# Altium PCB MT-PowerDivider V1.0.0.PcbDoc
Units mm, origin at the board's own origin, x right, y up, seen from the top; angles counter-clockwise.
Board outline 75.06 x 73.51 mm, 2 copper layers (Top Layer, Bottom Layer); 124 components, 81 nets, 532 pads, 31 vias.
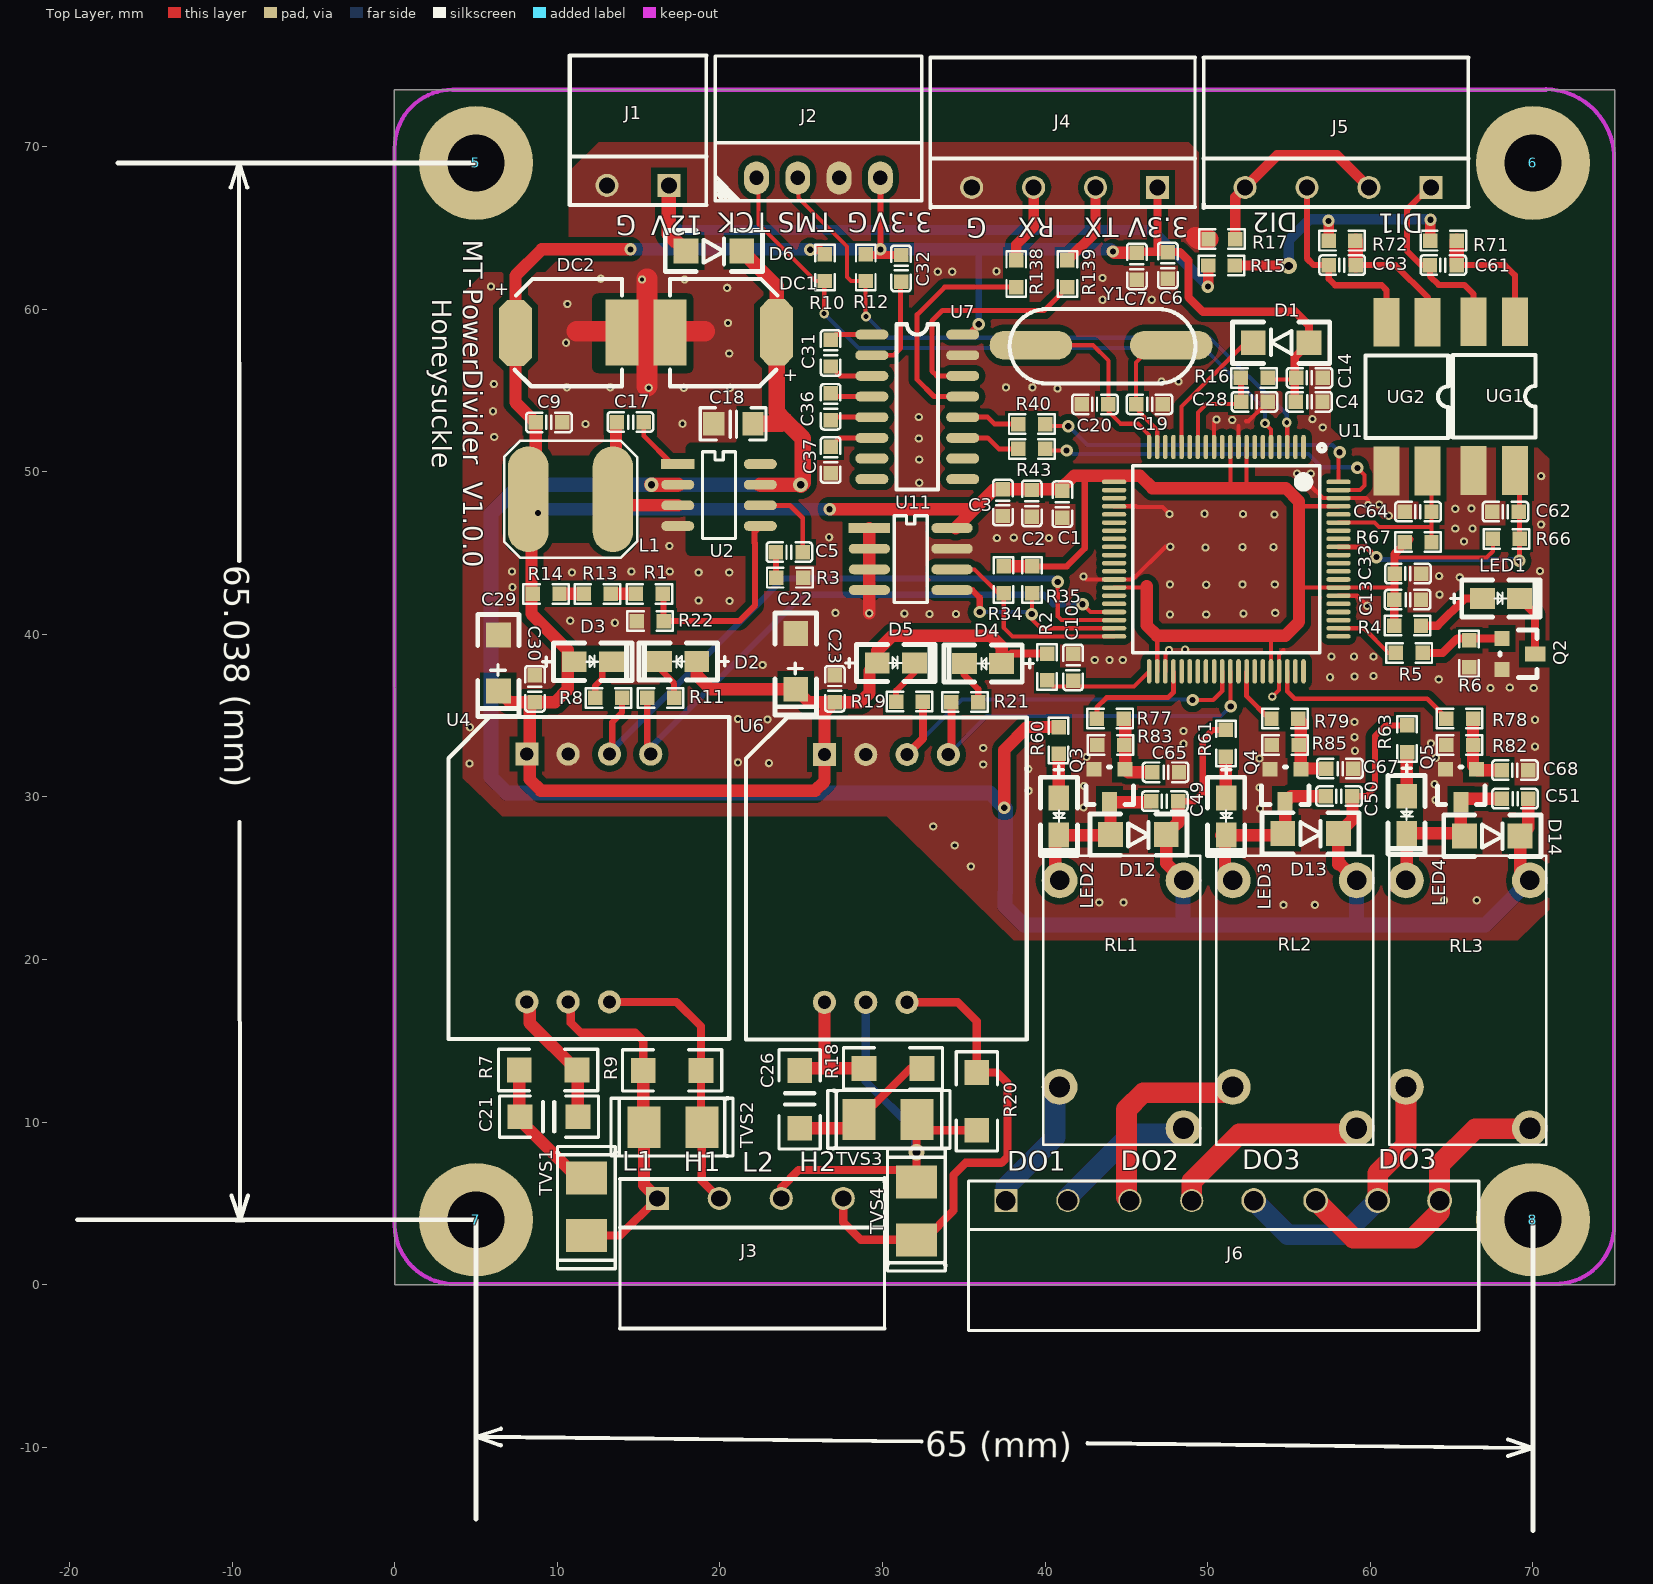
[diagram p0: Top Layer view]
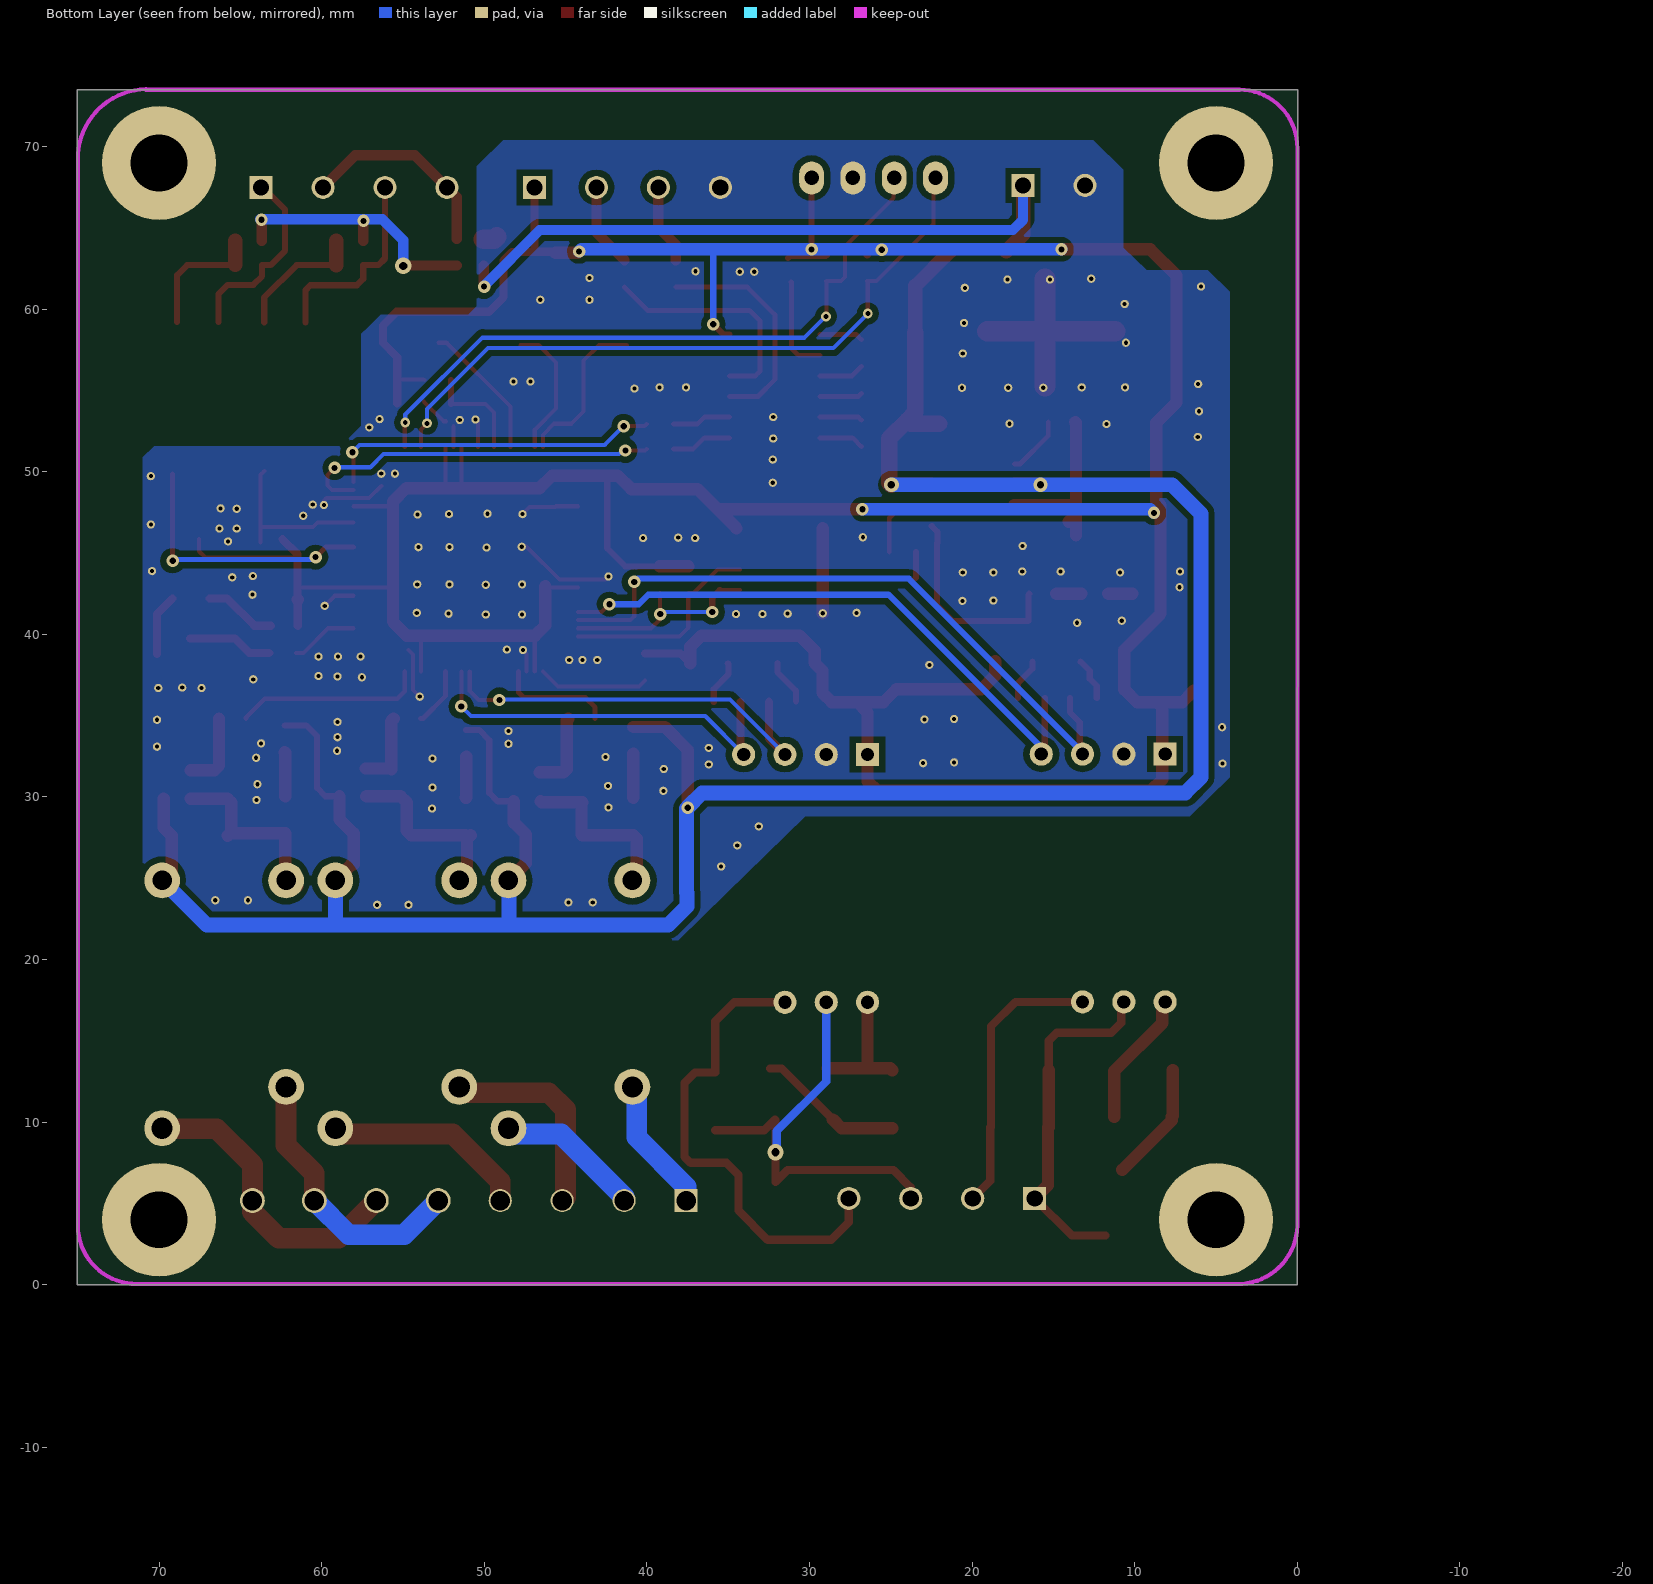
[diagram p1: Bottom Layer view, seen from below]

## Layer stack, top to bottom
Top Layer: signal copper 0.0356
Dielectric: dielectric 0.32, FR-4, Dk 4.8
Bottom Layer: signal copper 0.0356

## Board outline
0,0 6.934,0 74.981,0 75.032,0 75.032,5.436 75.032,73.381 75.032,73.482 69.893,73.482 69.875,73.5 50.622,73.5 -0.018,73.5 -0.025,73.508

## Design rules (kind name [scope] priority, off if disabled: settings)
Clearance Clearance_1 [INPolygon] p1: gap=0.381
Clearance [All] p2: gap=0.152
ComponentClearance [All] p1 off: gap=0 collisioncheckmode=3 verticalgap=0 showdistances=FALSE
HoleSize [All] p1: absolutevalues=TRUE maxlimit=12.7 minlimit=0.025 maxpercent=80.000 minpercent=20.000
HoleToHoleClearance [All] p1 off: gap=0.254 allowstackedmicrovias=TRUE
MinimumSolderMaskSliver [All] p1: minsoldermaskwidth=0
NetAntennae [All] p1: netantennaetolerance=0.254
PlaneConnect PlaneConnect_1 [All] p1: planeconnectstyle=NoConnect reliefexpansion=0.508 reliefentries=4 reliefconductorwidth=0.254 reliefairgap=0.254
PolygonConnect PolygonConnect_1 [IsVia] p1: connectstyle=Direct reliefconductorwidth=0.254 reliefentries=4 polygonreliefangle="90 Angle" airgapwidth=0.254
PolygonConnect [All] p2: connectstyle=Direct reliefconductorwidth=0.254 reliefentries=4 polygonreliefangle="90 Angle" airgapwidth=0.254
RoutingVias [All] p1: holewidth=0.305 width=0.61 viastyle="Through Hole" minholewidth=0.254 minwidth=0.457 maxholewidth=10 maxwidth=10
SilkToSilkClearance [All] p1: silktosilkclearance=0
SilkToSolderMaskClearance [IsPad] p1: minsilkscreentomaskgap=0 clearancetoexposedcopper=TRUE
SolderMaskExpansion [All] p1: expansion=0.102
Width Width_1 [All] p1: maxlimit=1.27 minlimit=0.127 preferedwidth=0.254
20 further rules are at their usual default settings.

## Components (designator, comment, footprint, x,y, rotation, side; value= is the part's Value field where it differs from the comment)
5 "" HOLD-3.5MM#1 -12.573,68.809 r90 top
6 "" HOLD-3.5MM#2 81.458,69.037 r90 top
7 "" HOLD-3.5MM#3 81.93,5.182 r90 top
8 "" HOLD-3.5MM#4 92.445,5.182 r90 top
C1 "0.1uF" 0603C 41.061,48.006 r270 top
C2 "0.1uF" 0603C 39.181,48.057 r270 top
C3 "0.1uF" 0603C 37.403,48.108 r270 top
C4 "0.1uF" 0603C 56.236,54.305 r0 top
C5 "3.9nF" 0603C 24.272,45.06 r180 top
C6 "0.1uF" 0603C 47.549,62.687 r270 top
C7 "0.1uF" 0603C 45.644,62.636 r270 top
C9 "104" 0603C 9.489,53.035 r180 top
C10 "0.1uF/NC" 0603C 41.721,37.973 r270 top
C13 "10nF" 0603C 62.295,42.139 r0 top
C14 "0.1uF" 0603C 56.261,55.778 r180 top
C17 "103" 0603C 14.493,53.061 r0 top
C18 "0.1uF" 0805C 19.75,52.959 r0 top
C19 "22P" 0603C 46.42,54.153 r0 top
C20 "22P" 0603C 43.068,54.153 r180 top
C21 "10nF/2KV/1206" 1206C 9.489,10.338 r0 top
C22 "10uF/16V" CA1206 24.678,36.627 r270 top
C23 "0.1uF" 0603C 27.066,36.652 r90 top
C26 "10nF/2KV/1206" 1206C 24.907,11.405 r270 top
C28 "0.1uF" 0603C 52.883,54.305 r180 top
C29 "10uF/16V" CA1206 6.39,36.525 r270 top
C30 "0.1uF" 0603C 8.625,36.652 r270 top
C31 "0.1uF" 0603C 26.812,57.302 r90 top
C32 "0.1uF" 0603C 31.14,62.509 r90 top
C33 "1uF" 0603C 62.321,43.739 r180 top
C36 "0.1uF" 0603C 26.812,54 r90 top
C37 "0.1uF" 0603C 26.812,50.724 r90 top
C49 "104" 0603C 47.36,29.743 r180 top
C50 "104" 0603C 58.079,30.048 r180 top
C51 "104" 0603C 68.899,29.896 r0 top
C61 "104" 0603C 64.491,62.713 r180 top
C62 "104" 0603C 68.315,47.549 r180 top
C63 "104" 0603C 58.268,62.713 r180 top
C64 "104" 0603C 62.941,47.549 r180 top
C65 "103" 0603C 47.411,31.521 r0 top
C67 "104" 0603C 58.13,31.75 r0 top
C68 "104" 0603C 68.899,31.648 r180 top
D1 "1N4148" 1206D 54.523,57.937 r180 top
D2 "GREEN" D0805 18.582,38.329 r270 top
D3 "RED" D0805 11.038,38.329 r90 top
D4 "GREEN" D0805 37.327,38.202 r270 top
D5 "RED" D0805 29.682,38.252 r90 top
D6 "1N4007" 1206D 19.623,63.576 r0 top
D12 "1N4007" 1206D 45.735,27.686 r0 top
D13 "1N4007" 1206D 56.326,27.762 r0 top
D14 "1N4007" 1206D 67.502,27.61 r0 top
DC1 "100uF/25V" C100UF16VEJ 23.484,58.572 r180 top
DC2 "100uF/25V" C100UF16VEJ 7.431,58.554 r0 top
J1 "CON2" KF2EDG-2P=3.81mm 16.866,67.615 r180 top
J2 "CON4" COM4-2.54mm-90 22.25,68.072 r0 top
J3 "HEADER 4" KF2EDG-4P-3.81mm 16.154,5.309 r0 top
J4 "HEADER 4" KF2EDG-4P-3.81mm 46.914,67.488 r180 top
J5 "HEADER 4" KF2EDG-4P-3.81mm 63.729,67.488 r180 top
J6 "CON8" KF2EDG-8P-3.81mm 37.592,5.182 r0 top
L1 "22uH" LC7*7*3_L 10.82,48.311 r180 top
LED1 "RED" D0805 66.893,42.215 r90 top
LED2 "RED" D0805 40.858,29.947 r0 top
LED3 "RED" D0805 51.145,29.947 r0 top
LED4 "RED" D0805 62.245,30.048 r0 top
Q2 "8050" SOT23 68.087,39.751 r270 top
Q3 "8050" SOT23 44.922,31.725 r180 top
Q4 "8050" SOT23 55.729,31.725 r180 top
Q5 "8050" SOT23 66.537,31.725 r180 top
R1 "1.1kΩ%" 0603R 15.661,42.494 r0 top
R2 "10K" 0603R 40.121,37.998 r90 top
R3 "6.8k" 0603R 24.297,43.485 r0 top
R4 "10K" 0603R 62.295,40.538 r180 top
R5 "10K" 0603R 62.397,38.862 r0 top
R6 "3K" 0603R 66.08,38.811 r90 top
R7 "1M" 1206R 9.438,13.208 r0 top
R8 "1.5k" 0603R 13.159,36.093 r0 top
R9 "120R" 1206R 17.058,13.183 r0 top
R10 "10K" 0603R 26.456,62.56 r90 top
R11 "1.5k" 0603R 16.359,36.093 r180 top
R12 "10K" 0603R 28.971,62.56 r90 top
R13 "10k%1" 0603R 12.461,42.494 r0 top
R14 "15k%1" 0603R 9.311,42.494 r0 top
R15 "0R" 0603R 50.851,62.687 r180 top
R16 "10K" 0603R 52.857,55.778 r180 top
R17 "0R" 0603R 50.876,64.313 r180 top
R18 "1M" 1206R 30.647,13.31 r0 top
R19 "1.5k" 0603R 31.663,35.865 r0 top
R20 "120R" 1206R 35.803,11.278 r90 top
R21 "1.5k" 0603R 35.067,35.839 r180 top
R22 "10k%1" 0603R 15.712,40.818 r180 top
R34 "10k" 0603R 37.454,43.358 r270 top
R35 "10K" 0603R 39.207,43.358 r270 top
R40 "0R" 0603R 39.181,52.934 r180 top
R43 "0R" 0603R 39.181,51.41 r180 top
R60 "10K" 0603R 40.832,33.477 r90 top
R61 "10K" 0603R 51.119,33.299 r90 top
R63 "10K" 0603R 62.27,33.579 r90 top
R66 "10K" 0603R 68.366,45.872 r0 top
R67 "10K" 0603R 62.941,45.669 r0 top
R71 "10K" 0603R 64.505,64.211 r0 top
R72 "10K" 0603R 58.262,64.211 r0 top
R77 "5.1K" 0603R 44.007,34.823 r0 top
R78 "5.1K" 0603R 65.496,34.823 r0 top
R79 "5.1K" 0603R 54.752,34.823 r0 top
R82 "4.7K" 0603R 65.496,33.198 r0 top
R83 "4.7K" 0603R 44.033,33.198 r0 top
R85 "4.7K" 0603R 54.764,33.198 r0 top
R138 "10R" 0603R 38.227,62.179 r90 top
R139 "10R" 0603R 41.377,62.179 r90 top
RL1 "JQ1P-24V" HF32F-12V 41.91,24.867 r90 top
RL2 "JQ1P-24V" HF32F-12V 52.56,24.867 r90 top
RL3 "JQ1P-24V" HF32F-12V 63.21,24.867 r90 top
TVS1 "BA301N" 3528TVS 11.786,6.579 r90 top
TVS2 "BA301N" 3528TVS 18.887,9.703 r0 top
TVS3 "BA301N" 3528TVS 28.564,10.16 r180 top
TVS4 "BA301N" 3528TVS 32.095,2.769 r270 top
U1 "LPC1756FBD80" LQFP-80 51.145,44.628 r180 top
U2 "EUP3484" SOP8#1 17.414,50.47 r0 top
U4 "CTM8251" CTM8251KT 8.128,32.639 r270 top
U6 "CTM8251" CTM8251KT 26.431,32.614 r270 top
U7 "SP3232" SO-16 29.352,58.445 r0 top
U11 "AT24C16" SOP8#2 29.199,46.533 r0 top
UG1 "PS2501L-1" DIP-4 68.899,59.207 r0 top
UG2 "PS2501L-1" DIP-4 63.54,59.182 r0 top
Y1 "12M" ZS_SMD 39.131,57.785 r0 top locked

## Footprints (in the part's own frame and the unit in brackets; to place one, negate y for a bottom-side part, rotate by r counter-clockwise, add the part's x,y. Pads: shape width x height; smd on the part's side, far side on the other; paste and mask are expansions set on the pad)
0603C [mil]
  rect 35x35 smd: 1(-32.5,0) 2(32.5,0)
  silkscreen extent -55,-24 55,24
0603R [mil]
  rect 35x35 smd: 1(-32.5,0) 2(32.5,0)
  silkscreen extent -55,-24 55,24
0805C [mil]
  rect 52x56 smd: 1(-5,0) 2(90,0)
  silkscreen extent -38,-40 121,38
1206C [mil]
  rect 60x60 smd: 1(-70,0) 2(70,0)
  silkscreen extent -120,-50 120,50
1206D [mil]
  rect 60x60 smd: 1(-67.5,0) 2(67.5,0)
  silkscreen extent -118,-50 117,50
1206R [mil]
  rect 60x60 smd: 1(-70,0) 2(70,0)
  silkscreen extent -120,-50 120,50
3528TVS [mil]
  rect 80x100 smd: 1(0.09,-0.25) 2(-139.91,-0.25)
  silkscreen extent -220,-70 76,70
C100UF16VEJ [mil]
  oct 80x160 smd: 1(-0.01,-0.43)
  rect 80x160 smd: 2(257.94,0.35)
  silkscreen extent -2,-130 258,130
CA1206 [mil]
  rect 60x60 smd: 1(-0.08,-0.48) 2(-135.08,-0.48)
  silkscreen extent -185,-50 62,50
COM4-2.54mm-90 [mil]
  oval 60x80 hole 35: 1(0,0) 2(100,0) 3(200,0) 4(300,0)
  silkscreen extent -100,-55 400,295
CTM8251KT [mil]
  rect 56x56 hole 32: 1(0,0)
  round 56 hole 32: 2(0,100) 3(0,200) 4(0,300) 6(600,200) 7(600,100) 8(600,0)
  silkscreen extent -90,-190 690,490, body extent -90,-190 690,490, height 276
D0805 [mil]
  rect 50x60 smd: 1(-0.34,-0.09) 2(-0.34,-90.09)
  silkscreen extent -45,-140 45,77
DIP-4 [mm]
  rect 1.6x3 smd: 1(-0.008,0.015) 2(-2.548,0.015) 3(-2.548,-9.129) 4(-0.008,-9.129)
  silkscreen extent -3.82,-7.1 1.26,-2.02
HF32F-12V [mm]
  round 2.2 hole 1.2: 1(0,1.016) 2(0,-6.604)
  round 2.2 hole 1.3: 3(-12.7,1.016) 4(-15.24,-6.604)
  silkscreen extent -16.26,-7.62 1.52,2.03
HOLD-3.5MM#1 [mm] "HOLD-3.5MM"
  round 7 hole 3.5: 1(0.191,-17.573)
HOLD-3.5MM#2 [mm] "HOLD-3.5MM"
  round 7 hole 3.5: 1(-0.037,11.458)
HOLD-3.5MM#3 [mm] "HOLD-3.5MM"
  round 7 hole 3.5: 1(-1.182,76.93)
HOLD-3.5MM#4 [mm] "HOLD-3.5MM"
  round 7 hole 3.5: 1(-1.182,22.445)
KF2EDG-2P=3.81mm [mil]
  rect 56x56 hole 39.37: 1(0,0)
  round 56 hole 39.37: 2(150,0)
  silkscreen extent -91,-315 240,47
KF2EDG-4P-3.81mm [mil]
  rect 56x56 hole 39.37: 1(0,0)
  round 56 hole 39.37: 2(150,0) 3(300,0) 4(450,0)
  silkscreen extent -91,-315 550,50
KF2EDG-8P-3.81mm [mil]
  rect 56x56 hole 47.24: 1(0,0)
  round 56 hole 47.24: 2(150,0) 3(300,0) 4(450,0)
  round 60 hole 47.24: 5(600,0) 6(750,0) 7(900,0) 8(1050,0)
  silkscreen extent -91,-315 1145,47
LC7*7*3_L [mm]
  oval 2.5x6.5 smd: 1(-2.6,0) 2(2.6,0)
  Top Layer pour cut-out: -1.803,2.705 1.854,2.705 1.854,-2.705 -1.803,-2.705
  silkscreen extent -4.09,-3.61 4.09,3.61, body extent -2.46,-2.4 1.85,2.4, height 3.5
LQFP-80 [mm] "LQFP-80_12x12x05P"
  oval 0.28x1.5 smd mask+0.051: 1(-4.75,-6.9) 2(-4.25,-6.9) 3(-3.75,-6.9) 4(-3.25,-6.9) 5(-2.75,-6.9) 6(-2.25,-6.9) 7(-1.75,-6.9) 8(-1.25,-6.9) 9(-0.75,-6.9) 10(-0.25,-6.9) 11(0.25,-6.9) 12(0.75,-6.9) 13(1.25,-6.9) 14(1.75,-6.9) 15(2.25,-6.9) 16(2.75,-6.9) 17(3.25,-6.9) 18(3.75,-6.9) 19(4.25,-6.9) 20(4.75,-6.9) 41(4.75,6.9) 42(4.25,6.9) 43(3.75,6.9) 44(3.25,6.9) 45(2.75,6.9) 46(2.25,6.9) 47(1.75,6.9) 48(1.25,6.9) 49(0.75,6.9) 50(0.25,6.9) 51(-0.25,6.9) 52(-0.75,6.9) 53(-1.25,6.9) 54(-1.75,6.9) 55(-2.25,6.9) 56(-2.75,6.9) 57(-3.25,6.9) 58(-3.75,6.9) 59(-4.25,6.9) 60(-4.75,6.9)
  oval 1.5x0.28 smd mask+0.051: 21(6.9,-4.75) 22(6.9,-4.25) 23(6.9,-3.75) 24(6.9,-3.25) 25(6.9,-2.75) 26(6.9,-2.25) 27(6.9,-1.75) 28(6.9,-1.25) 29(6.9,-0.75) 30(6.9,-0.25) 31(6.9,0.25) 32(6.9,0.75) 33(6.9,1.25) 34(6.9,1.75) 35(6.9,2.25) 36(6.9,2.75) 37(6.9,3.25) 38(6.9,3.75) 39(6.9,4.25) 40(6.9,4.75) 61(-6.9,4.75) 62(-6.9,4.25) 63(-6.9,3.75) 64(-6.9,3.25) 65(-6.9,2.75) 66(-6.9,2.25) 67(-6.9,1.75) 68(-6.9,1.25) 69(-6.9,0.75) 70(-6.9,0.25) 71(-6.9,-0.25) 72(-6.9,-0.75) 73(-6.9,-1.25) 74(-6.9,-1.75) 75(-6.9,-2.25) 76(-6.9,-2.75) 77(-6.9,-3.25) 78(-6.9,-3.75) 79(-6.9,-4.25) 80(-6.9,-4.75)
  silkscreen extent -6.07,-7.05 5.75,5.75
SO-16 [mil]
  oval 80x24 smd: 1(-0.2,-0.3) 2(-0.2,-50.3) 3(-0.2,-100.3) 4(-0.2,-150.3) 5(-0.2,-200.3) 6(-0.2,-250.3) 7(-0.2,-300.3) 8(-0.2,-350.3) 9(219.8,-350.3) 10(219.8,-300.3) 11(219.8,-250.3) 12(219.8,-200.3) 13(219.8,-150.3) 14(219.8,-100.3) 15(219.8,-50.3) 16(219.8,-0.3)
  silkscreen extent 60,-375 160,25
SOP8#1 [mm]
  rect 2.032x0.6 smd: 1(-0.006,0.006)
  oval 2.032x0.6 smd: 2(-0.006,-1.264) 3(-0.006,-2.534) 4(-0.006,-3.804) 5(5.074,-3.804) 6(5.074,-2.534) 7(5.074,-1.264) 8(5.074,0.006)
  silkscreen extent 1.52,-4.57 3.55,0.77
SOP8#2 [mm]
  rect 2.54x0.6 smd: 1(-0.006,0.006)
  oval 2.54x0.6 smd: 2(-0.006,-1.264) 3(-0.006,-2.534) 4(-0.006,-3.804) 5(5.074,-3.804) 6(5.074,-2.534) 7(5.074,-1.264) 8(5.074,0.006)
  silkscreen extent 1.52,-4.57 3.55,0.77
SOT23 [mil]
  rect 36x36 smd: 1(-0.08,0.75) 3(74.92,0.75)
  rect 36x50 smd: 2(37.92,80.75)
  silkscreen extent -20,-4 95,86
ZS_SMD [mil]
  oval 200x70 smd: 1(0,0) 2(340,0)
  silkscreen extent -51,-92 399,88

## Part data
5 6 7 8: library part HOLD_5X9MM
C1 C2 C3 C4 C6 C7 C13 C19 C20: library part CAP1
C5 C17 C18: library part CAP
C9 C23 C30 C31 C32 C33 C36 C37 C49 C50 C61 C62 C63 C64 C65 C67: library part CAP, "Capacitor"
C10 C28: library part CAP1, "CAP"
C14: library part CAP_3, "Capacitor"
C21 C26: library part 0.1uF, "C0603"
C22 C29 DC1 DC2: library part CAP2
C51 C68: library part Cap, "Capacitor"
D1 D6 D12 D13 D14: library part DIODE
D2 D3 D4 D5 LED1 LED2 LED3 LED4: library part LED
J2: "Connector"
J3 J4 J5: library part "4 HEADER", "4 Pin Header"
L1: library part INDUCTOR
Q2 Q3 Q4 Q5: library part NPN
R1 R3 R13 R14 R22: library part R_S
R2 R40 R43 R138 R139: library part RES-1, "RES"
R4 R5 R6 R10 R12 R15 R16 R17 R60 R61 R63 R66 R67 R71 R72 R77 R78 R79 R82 R83 R85: library part RES1
R7 R8 R9 R11 R18 R19 R20 R21: library part RES2
R34 R35: library part RES1, "0603贴片电阻/10K/0.1W/±5%"
RL1 RL2 RL3: library part JQ1P-12V
TVS1 TVS3: library part TVS-D
TVS2 TVS4: library part TVS
U1: "LPC1756FBD80,LQFP-80_12x12x05P,NXP"
U7: library part MAX232ESE
U11: library part AT24C64, "EEPROM/64K/2.7V/SOP8/ATMEL"
UG1 UG2: library part PS2501-1
Y1: library part CRYSTAL

## Free pads (board coordinates)
  round 0.508 hole 0.254: 0(47.65,47.396) 0(49.86,45.339) 1(49.809,47.422) 1(50.546,53.213) 2(51.511,53.188) 2(52.172,47.396) 3(37.592,55.194) 3(54.102,47.371) 4(39.218,55.194) 4(47.701,45.39) 5(18.694,43.815) 5(47.676,43.078) 6(20.574,43.815) 6(47.676,41.224) 7(18.694,42.088) 7(49.911,43.053) 8(20.599,42.062) 8(49.911,41.224) 9(22.631,38.125) 9(52.146,43.078) 10(27.102,41.326) 10(52.197,41.275) 11(29.185,41.3) 11(54.153,41.326) 12(43.053,38.43) 12(54.127,43.078) 13(43.967,38.43) 13(54.051,45.364) 14(44.78,38.43) 14(52.146,45.364) 15(37.033,45.923) 15(53.975,36.17) 16(38.075,45.949) 16(47.625,39.04) 17(40.234,45.923) 17(48.616,39.065) 18(57.607,38.633) 18(59.817,41.758) 19(42.367,43.561) 19(59.004,38.633) 20(10.617,60.325) 20(60.198,38.633) 21(10.541,57.937) 21(59.03,37.414) 22(10.592,55.194) 22(57.531,37.363) 23(13.259,55.194) 23(60.198,37.44) 24(15.621,55.169) 24(64.211,37.236) 25(17.78,55.169) 25(67.386,36.703) 26(20.625,55.169) 26(68.58,36.728) 27(20.574,57.277) 27(70.053,36.703) 28(20.498,59.157) 28(70.129,34.747) 29(20.447,61.316) 29(70.129,33.096) 30(16.916,43.866) 30(59.868,47.955) 31(14.554,43.866) 31(60.554,47.981) 32(10.897,43.815) 32(61.138,47.295) 33(21.107,34.798) 33(65.227,47.727) 34(22.936,34.773) 34(66.218,47.752) 35(23.012,32.08) 35(65.227,46.507) 36(21.107,32.131) 36(66.294,46.507) 37(65.761,45.72) 38(13.538,40.716) 38(70.51,49.733) 39(10.795,40.843) 39(70.51,46.761) 40(70.434,43.891) 41(64.237,43.586) 42(64.262,42.443) 43(65.507,43.51) 44(31.344,41.275) 45(32.893,41.25) 46(34.519,41.25) 47(32.233,53.365) 48(32.233,52.045) 49(32.258,50.749) 50(32.258,49.327) 51(5.918,61.392) 52(6.096,55.397) 53(6.045,53.721) 54(6.121,52.146) 55(40.767,55.118) 56(16.891,45.441) 57(56.439,53.238) 58(57.074,52.73) 59(56.337,49.886) 60(55.499,49.886) 61(43.536,61.925) 62(43.536,60.579) 63(46.558,60.579) 64(33.401,62.306) 65(34.29,62.306) 66(33.122,28.194) 67(34.442,27.026) 68(35.433,25.73) 69(4.597,32.055) 70(4.623,34.29) 71(43.332,23.52) 72(44.831,23.52) 73(54.661,23.368) 74(56.591,23.368) 75(64.541,23.647) 76(66.548,23.647) 77(17.704,52.959) 78(11.735,52.934) 79(7.214,43.866) 80(7.239,42.901) 81(47.168,55.55) 82(48.209,55.55) 83(26.721,45.974) 84(63.957,30.785) 85(64.008,29.82) 86(64.033,32.41) 87(53.188,32.36) 88(53.188,30.582) 89(53.213,29.286) 90(48.514,34.061) 91(48.514,33.274) 92(42.393,30.683) 93(42.367,29.362) 94(42.545,32.461) 95(36.195,32.004) 96(36.195,33.02) 97(38.964,31.725) 98(38.989,30.378) 99(59.03,34.62) 100(59.03,33.68) 101(59.055,32.842) 102(63.729,33.299) 103(12.675,61.874) 104(15.215,61.824) 105(17.831,61.824) 106(37.008,62.332)

## Via types
v1: diameter 0.762, hole 0.381, Top Layer to Bottom Layer, 23 vias
v2: diameter 0.61, hole 0.305, Top Layer to Bottom Layer, 4 vias
v3: diameter 1.016, hole 0.508, Top Layer to Bottom Layer, 1 vias
v4: diameter 0.889, hole 0.457, Top Layer to Bottom Layer, 1 vias
v5: diameter 0.914, hole 0.457, Top Layer to Bottom Layer, 1 vias
v6: diameter 1, hole 0.5, Top Layer to Bottom Layer, 1 vias

## Nets (pads, with @x,y where several pads share a name; then routed paths per layer and width w, separated by ;. In a path a pad name is that pad's centre, name@x,y a point inside that pad or via, vN(x,y) a via of type N, cw(c..) or ccw(c..) an arc to the next point about the centre after c; other vN are vias at no path point)
CAN_RD1: R11.2 U1.37 U4.4 | length 36.8
  Top Layer w0.254: v1(42.306,41.859) 42.787,41.378 U1.37
  Top Layer w0.381: R11.2 15.534,33.02 U4.4@15.915,32.639
  Bottom Layer w0.381: U4.4@15.915,32.639 15.915,33.223 25.135,42.443 39.918,42.443 40.502,41.859 v1(42.306,41.859)
CAN_RD2: R21.2 U1.51 U6.4 | length 24.1
  Top Layer w0.254: R21.2@34.228,35.839 R21.2 ; U1.51 51.395,35.575 v1(51.424,35.575)
  Top Layer w0.508: U6.4 34.241,32.804 R21.2
  Bottom Layer w0.254: U6.4 36.413,34.976 50.825,34.976 v1(51.424,35.575)
CAN_TD1: R8.2 U1.38 U4.3 | length 41.5
  Top Layer w0.254: v1(40.782,43.231) 40.782,41.097 41.001,40.878 U1.38
  Top Layer w0.381: U4.3@13.375,32.639 13.375,34.595 13.985,35.204 R8.2
  Bottom Layer w0.381: U4.3@13.375,32.639 13.375,32.918 23.891,43.434 40.578,43.434 v1(40.782,43.231)
CAN_TD2: R19.2 U1.50 U6.3 | length 25.9
  Top Layer w0.254: v1(49.073,35.966) 50.343,35.966 50.895,36.518 U1.50
  Top Layer w0.508: U6.3 32.488,33.591 R19.2
  Bottom Layer w0.254: U6.3 34.889,35.992 49.073,35.992 v1(49.073,35.966)
CANH1: J3.2 R9.2 TVS2.1 U4.6 | length 17.1
  Top Layer w0.508: U4.6@13.375,17.399 17.337,17.399 18.836,15.9 R9.2 TVS2.1@18.836,9.696 ; TVS2.1 18.889,6.384 J3.2
CANH2: J3.4 R20.2 TVS4.1 U6.6 | length 30
  Top Layer w0.508: J3.4 27.584,3.85 28.668,2.766 TVS4.1 32.575,2.766 34.373,4.565 34.373,6.764 35.108,7.498 37.307,7.498 37.683,7.874 37.683,12.421 37.048,13.056 R20.2 35.803,16.205 34.635,17.374 U6.6
CANL1: J3.1 R9.1 TVS1.2 TVS2.2 U4.7 | length 21.5
  Top Layer w0.508: U4.7@10.835,17.399 10.835,16.104 11.445,15.494 14.797,15.494 15.28,15.011 R9.1 ; TVS1.2 13.871,3.025 J3.1
  Top Layer w0.762: TVS2.2@15.28,9.696 R9.1 ; TVS2.2 15.333,6.13 J3.1
CANL2: J3.3 R20.1 TVS3.2 TVS4.2 U6.7 | length 28
  Top Layer w0.508: J3.3 23.774,5.994 24.841,7.061 31.35,7.061 TVS4.2 TVS3.2@32.088,10.137 ; TVS3.2 32.785,9.5 R20.1
  Bottom Layer w0.508: U6.7 28.971,12.497 32.019,9.449 32.019,8.23 v6(32.095,8.153)
DGND: C1.2 C2.2 C3.2 C4.2 C6.2 C7.2 C9.1 C10.1 C13.2 C14.1 C18.1 C19.2 C20.2 C22.2 C23.2 C28.1 C29.2 C30.1 C33.1 C37.1 C62.2 C64.2 C65.2 C67.2 C68.1 DC1.2 DC2.2 J1.2 J2.3 J4.4 pad.0 pad.1 pad.2 pad.3 pad.4 pad.5 pad.6 pad.7 pad.8 pad.9 pad.10 pad.11 pad.12 pad.13 pad.14 pad.15 pad.16 pad.17 pad.18 pad.19 pad.20 pad.21 pad.22 pad.23 pad.24 pad.25 pad.26 pad.27 pad.28 pad.29 pad.30 pad.31 pad.32 pad.33 pad.34 pad.35 pad.36 pad.37 pad.38 pad.39 pad.40 pad.41 pad.42 pad.43 pad.44 pad.45 pad.46 pad.47 pad.48 pad.49 pad.50 pad.51 pad.52 pad.53 pad.54 pad.55 pad.56 pad.57 pad.58 pad.59 pad.60 pad.61 pad.62 pad.63 pad.64 pad.65 pad.66 pad.67 pad.68 pad.69 pad.70 pad.71 pad.72 pad.73 pad.74 pad.75 pad.76 pad.77 pad.78 pad.79 pad.80 pad.81 pad.82 pad.83 pad.84 pad.85 pad.86 pad.87 pad.88 pad.89 pad.90 pad.91 pad.92 pad.93 pad.94 pad.95 pad.96 pad.97 pad.98 pad.99 pad.100 pad.101 pad.102 pad.103 pad.104 pad.105 pad.106 Q2.3 Q3.3 Q4.3 Q5.3 R3.2 R6.1 R17.2 R22.2 R82.1 R83.1 R85.1 U1.9 U1.12 U1.24 U1.33 U1.43 U1.57 U1.66 U1.78 U2.4 U4.2 U6.2 U7.15 U11.1 U11.2 U11.3 U11.4 U11.7 UG1.3 UG2.3 | length 45.6
  Top Layer w0.254: pad.19@42.367,43.561 42.55,43.378 U1.33 45.384,43.378 47.396,45.39 pad.4@47.701,45.39 ; U1.24 45.594,47.878 45.644,47.828 47.219,47.828 pad.0@47.65,47.396 ; U1.43 47.395,38.81 pad.16@47.625,39.04 ; U1.12 pad.1@50.395,53.062 ; U1.9 51.895,52.804 ; 52.349,53.111 52.514,53.111 C28.1 ; pad.15@53.975,36.17 54.395,36.589 U1.57 54.395,38.774 54.661,39.04 ; 56.337,49.124 57.083,48.378 U1.78 59.725,48.378 59.868,48.235 ; U1.66 59.197,42.378 pad.18@59.817,41.758
  Top Layer w0.762: pad.11@29.193,41.309 U11.4 U11.3 U11.1
  Top Layer w1.2: 49.225,64.465 49.378,64.313 R17.2
  Top Layer w1.27: 11.201,58.649 15.519,58.649 ; pad.24@15.519,55.27 15.519,58.649 ; 15.519,61.874 15.519,58.649 ; 19.05,58.649 15.519,58.649
DI1: C62.1 R66.2 U1.72 UG1.4 | length 16.8
  Top Layer w0.305: U1.72 58.058,45.364 59.766,45.364 v1(60.376,44.755) ; v1(69.164,44.526) 69.191,44.553 R66.2 UG1.4@69.191,49.871
  Bottom Layer w0.305: v1(60.376,44.755) 60.528,44.602 69.088,44.602 v1(69.164,44.526)
DI2: C64.1 R67.2 U1.75 UG2.4 | length 10.3
  Top Layer w0.254: U1.75 60.259,46.878 60.528,46.609 63.767,46.609 ; UG2.4 63.767,49.819 C64.1 63.767,46.609 ; R67.2 63.767,46.609
DO1: R77.1 U1.44 | length 7.1
  Top Layer w0.305: R77.1 43.182,35.511 43.79,36.119 47.574,36.119 47.895,36.439 U1.44
DO1-1: J6.1 RL1.3 | length 7.9
  Bottom Layer w1.27: J6.1 37.592,6.031 40.629,9.068 RL1.3@40.629,11.811
DO1-2: J6.2 RL1.4 | length 8.7
  Bottom Layer w1.27: J6.2 41.402,5.396 45.277,9.271 RL1.4@48.249,9.271
DO2: R79.1 U1.53 | length 3.6
  Top Layer w0.305: U1.53 52.395,36.2 53.772,34.823 R79.1
DO2-1: J6.3 RL2.3 | length 12.2
  Top Layer w1.27: J6.3 45.011,5.383 45.011,10.782 46.039,11.811 RL2.3@51.069,11.811
DO2-2: J6.4 RL2.4 | length 12
  Top Layer w1.27: J6.4 49.022,6.35 51.943,9.271 RL2.4@58.689,9.271
DO3: R78.1 U1.58 | length 11.7
  Top Layer w0.305: U1.58 54.895,36.494 55.347,36.043 63.5,36.043 64.67,34.872 R78.1
DO3-1: J6.5 J6.7 RL3.3 | length 17.1
  Top Layer w1.27: J6.7 60.452,6.843 62.194,8.585 RL3.3
  Bottom Layer w1.27: J6.5 54.94,3.073 58.344,3.073 J6.7
DO3-2: J6.6 J6.8 RL3.4 | length 18.6
  Top Layer w1.27: J6.6 58.953,2.87 62.651,2.87 64.262,4.481 J6.8 64.262,7.391 66.472,9.601 69.788,9.601 RL3.4
DP3V3: C1.1 C2.1 C3.1 C4.1 C6.1 C7.1 C9.2 C13.1 C14.2 C22.1 C23.1 C29.1 C30.2 C32.2 C33.2 D1.1 D2.1 D3.1 D4.1 D5.1 DC2.1 J2.4 J4.1 L1.2 R2.2 R4.2 R10.2 R12.2 R14.1 R16.1 R34.1 R35.1 R66.1 R67.1 U1.8 U1.10 U1.21 U1.34 U1.42 U1.56 U1.67 U1.77 U4.1 U6.1 U7.16 U11.8 | length 278.4
  Top Layer w0.254: U1.34 46.169,42.878 46.243,42.951 ; 46.878,39.929 46.895,39.912 U1.42 ; 51.323,48.997 51.395,49.069 U1.10 ; 52.364,48.997 52.395,49.027 U1.8 ; R16.1@53.697,55.651 53.723,55.677 C14.2@55.359,55.677 ; 53.812,39.929 53.895,39.846 U1.56 ; 55.615,42.926 55.663,42.878 U1.67 61.447,42.878 61.495,42.926 ; 55.615,48.184 55.921,47.878 U1.77 ; 61.495,44.933 61.698,44.729 67.158,44.729 67.54,45.112 R66.1
  Top Layer w0.381: v1(29.87,63.678) J2.4 ; C32.2 C32.2@31.331,63.144 ; U7.16 35.273,58.438 v1(35.916,59.08) ; R35.1 41.338,44.183 42.443,45.288 42.443,49.759
  Top Layer w0.508: v1(25.552,63.652) 26.189,63.652 R10.2 ; R12.2 29.021,63.335 v1@29.87,63.335 ; v1(29.87,63.678) v1@29.87,63.335 ; C32.2 v1@29.87,63.335 ; D4.1 37.939,38.824 R2.2 ; C7.1 45.72,63.538 46.914,63.538 ; J4.1 46.914,63.538 ; C4.1@55.359,54.204 55.359,55.677 55.359,57.059 D1.1 56.237,59.002 55.397,59.842 49.708,59.842 48.819,60.731 48.819,62.992 48.298,63.513 C6.1 46.939,63.513 46.914,63.538 ; R4.2 C13.1 61.495,42.164 61.495,42.926 C33.2 61.495,44.933 R67.1@62.41,45.847
  Top Layer w0.762: C29.1 7.078,35.827 C30.2 ; v1(14.503,63.678) 9.042,63.678 7.431,62.067 DC2.1 7.431,54.267 C9.2 8.663,48.206 8.413,47.955 8.413,41.259 10.632,39.04 10.632,36.601 9.857,35.827 C30.2 ; D2.1 18.58,37.471 19.422,36.629 C22.1 25.468,35.827 C23.1 ; v1(26.746,47.701) 35.662,47.701 ; U11.8@34.499,46.539 35.662,47.701 ; D4.1 37.325,39.256 36.652,39.929 30.607,39.929 29.684,39.006 D5.1 29.199,37.759 29.199,36.398 28.628,35.827 C23.1 ; R34.1 R35.1 ; v1(44.171,63.551) 44.259,63.462 C7.1 ; 46.243,42.951 46.243,40.564 46.878,39.929 53.812,39.929 54.777,39.929 55.615,40.767 55.615,42.926 55.615,48.184 54.802,48.997 52.364,48.997 51.323,48.997 46.598,48.997 45.836,49.759 42.443,49.759 41.785,49.759 40.959,48.933 C3.1 36.893,48.933 35.662,47.701 ; C30.2 8.295,35.496 8.295,31.09 8.993,30.391 25.859,30.391 26.431,30.963 U6.1 26.431,35.192 C23.1
  Bottom Layer w0.381: 35.839,63.678 35.916,63.602 v1(35.916,59.08)
  Bottom Layer w0.762: v1(8.814,47.473) 9.042,47.701 v1(26.746,47.701) ; v1(14.503,63.678) v1(29.87,63.678) 35.839,63.678 44.044,63.678 v1(44.171,63.551)
ISP: C10.2 R2.1 U1.41 | length 6.8
  Top Layer w0.254: R2.1 40.49,36.804 45.471,36.804 U1.41
NetC5_1: C5.1 U2.6 | length 5
  Top Layer w0.305: U2.6 24.316,47.936 25.097,47.155 C5.1
NetC5_2: C5.2 R3.1 | length 1.6
  Top Layer w0.381: C5.2 23.446,43.51 R3.1
NetC17_2: C17.2 U2.1 | length 3.7
  Top Layer w0.305: C17.2 15.318,52.21 17.052,50.476 U2.1
NetC21_1: C21.1 R7.1 TVS1.1 | length 7.4
  Top Layer w0.762: C21.1@7.66,10.389 R7.1 ; C21.1 7.711,10.118 TVS1.1@10.765,7.063
NetC21_2: C21.2 R7.2 U4.8 | length 8.3
  Top Layer w0.762: U4.8@8.295,17.399 8.295,16.104 11.267,13.132 C21.2
NetC26_1: C26.1 R18.1 U6.8 | length 8.1
  Top Layer w0.762: C26.1 25.034,13.31 26.431,13.31 ; U6.8 26.431,13.31 ; R18.1 26.431,13.31
NetC26_2: C26.2 R18.2 TVS3.1 | length 9
  Top Layer w0.5: TVS3.1 31.705,13.31 R18.2
  Top Layer w0.762: C26.2 28.022,9.627 TVS3.1
NetC31_1: C31.1 U7.3 | length 2.8
  Top Layer w0.305: C31.1 27.383,55.905 29.339,55.905 U7.3
NetC31_2: C31.2 U7.1 | length 2.7
  Top Layer w0.305: C31.2 27.129,58.445 29.339,58.445 U7.1
NetC32_1: C32.1 U7.2 | length 6
  Top Layer w0.305: U7.2 30.69,57.168 31.117,57.594 31.117,61.66 C32.1
NetC36_1: C36.1 U7.5 | length 2.6
  Top Layer w0.305: C36.1 26.995,53.358 U7.5
NetC36_2: C36.2 U7.4 | length 2.6
  Top Layer w0.305: C36.2 27.01,54.628 U7.4
NetC37_2: C37.2 U7.6 | length 2.8
  Top Layer w0.305: C37.2 27.35,52.088 U7.6
NetC49_2: C49.2 D12.1 LED2.2 Q3.2 RL1.1 | length 11
  Top Layer w0.762: RL1.1@40.629,24.511 40.629,27.438 LED2.2 43.993,27.658 D12.1 44.02,29.612 Q3.2 46.465,29.674 C49.2
NetC50_2: C50.2 D13.1 LED3.2 Q4.2 RL2.1 | length 11.4
  Top Layer w0.762: LED3.2@50.831,27.658 51.069,27.421 RL2.1@51.069,24.511 ; LED3.2 54.508,27.658 D13.1 54.766,27.917 Q4.2 55.141,30.048 C50.2
NetC51_1: C51.1 D14.1 LED4.2 Q5.2 RL3.1 | length 11.7
  Top Layer w0.762: RL3.1@61.508,24.511 62.236,25.239 LED4.2 D14.1@65.638,27.76 ; D14.1 D14.1@65.638,27.76 ; C51.1 65.796,29.896 Q5.2 65.574,27.824 D14.1@65.638,27.76
NetC61_1: C61.1 R71.2 UG1.1 | length 8.2
  Top Layer w0.381: C61.1 68.275,62.713 68.892,62.096 UG1.1
  Top Layer w0.889: C61.1@65.331,62.727 R71.2
NetC63_1: C63.1 R72.2 UG2.1 | length 8.3
  Top Layer w0.381: C63.1 61.544,62.713 63.532,60.724 UG2.1
  Top Layer w0.889: C63.1 R72.2@59.093,64.206
NetC65_1: C65.1 Q3.1 R77.2 R83.2 | length 4.9
  Top Layer w0.762: R77.2 44.924,34.732 Q3.1 45.108,31.521 C65.1
NetC67_1: C67.1 Q4.1 R79.2 R85.2 | length 4.8
  Top Layer w0.762: R79.2 55.732,34.669 Q4.1 55.776,31.75 C67.1
NetC68_2: C68.2 Q5.1 R78.2 R82.2 | length 4.8
  Top Layer w0.762: R78.2 R82.2 66.321,31.924 Q5.1 66.596,31.648 C68.2
NetD1_2: D1.2 U1.16 | length 8.5
  Top Layer w0.254: U1.16 48.395,54.019 52.313,57.937 D1.2
NetD2_2: D2.2 R11.1 | length 2.6
  Top Layer w0.381: D2.2 16.294,37.874 17.185,36.982 R11.1
NetD3_2: D3.2 R8.1 | length 2.6
  Top Layer w0.381: R8.1 12.334,36.83 12.765,37.262 12.765,37.759 D3.2
NetD4_2: D4.2 R21.1 | length 2.8
  Top Layer w0.381: D4.2 34.982,38.21 34.982,37.55 35.892,36.639 R21.1
NetD5_2: D5.2 R19.1 | length 2.8
  Top Layer w0.381: R19.1 30.837,36.538 31.97,37.67 D5.2
NetLED1_1: LED1.1 R4.1 | length 4.5
  Top Layer w0.508: R4.1 64.15,40.538 65.817,42.206 LED1.1
NetLED1_2: LED1.2 Q2.2 | length 3.8
  Top Layer w0.508: LED1.2 70.138,41.25 Q2.2
NetLED2_1: LED2.1 R60.1 | length 2.7
  Top Layer w0.762: R60.1 40.832,29.961 LED2.1
NetLED3_1: LED3.1 R61.1 | length 2.5
  Top Layer w0.762: R61.1 51.119,29.961 LED3.1
NetLED4_1: LED4.1 R63.1 | length 2.7
  Top Layer w0.762: LED4.1 62.236,32.719 R63.1
NetQ2_1: Q2.1 R5.2 R6.2 | length 5.3
  Top Layer w0.508: R5.2 64.454,38.862 65.345,39.753 Q2.1
NetR1_1: R1.1 R13.2 | length 1.5
  Top Layer w0.762: R13.2 R1.1
NetR1_2: R1.2 R22.1 U2.5 | length 12.8
  Top Layer w0.381: R1.2 16.537,42.443 R22.1 21.198,40.818 22.151,41.77 22.151,45.606 22.132,45.625 22.132,46.31 U2.5
NetR13_1: R13.1 R14.2 | length 1.5
  Top Layer w0.762: R14.2 R13.1
NetR40_2: R40.2 U7.12 | length 3.6
  Top Layer w0.305: U7.12 36.471,53.358 36.895,52.934 R40.2
NetR43_2: R43.2 U7.11 | length 3.7
  Top Layer w0.305: U7.11 36.471,52.088 37.149,51.41 R43.2
NetR138_1: R138.1 U7.13 | length 14
  Top Layer w0.305: U7.13 33.172,54.628 32.131,55.669 32.131,59.665 33.82,61.354 R138.1
NetR139_1: R139.1 U7.14 | length 14.3
  Top Layer w0.305: U7.14 33.332,55.898 33.045,56.185 33.045,59.284 33.68,59.919 39.941,59.919 R139.1
NRST: C28.2 R16.2 U1.14 | length 6.5
  Top Layer w0.254: U1.14 49.395,53.647 49.926,54.178 C28.2@52.046,54.178
  Top Layer w0.381: C28.2@52.046,54.178 R16.2@52.046,55.651
RUN: R5.1 U1.62 | length 4.2
  Top Layer w0.254: U1.62 59.611,40.378 61.127,38.862 R5.1
SCL: R34.2 U1.40 U11.6 | length 12.9
  Top Layer w0.254: U11.6 35.67,43.999 37.137,42.532 R34.2 37.454,40.411 37.988,39.878 U1.40
SDA: R35.2 U1.39 U11.5 | length 12.9
  Top Layer w0.254: U11.5 U11.5@35.518,42.729 ; R35.2 39.207,40.919 39.748,40.378 U1.39
  Top Layer w0.381: U11.5@35.518,42.729 35.981,42.266 v1(35.981,41.377)
  Bottom Layer w0.254: v1(35.981,41.377) 39.054,41.377 v1(39.181,41.25)
SW0: C17.1 L1.1 U2.3 | length 10.8
  Top Layer w0.762: L1.1@13.613,46.092 13.613,47.371 L1.1@14.064,46.92 ; C17.1 13.613,53.006 13.613,47.955 13.632,47.936 U2.3
TCK: J2.1 R10.1 U1.5 | length 42.5
  Top Layer w0.254: J2.1 22.378,67.944 22.378,65.228 25.872,61.735 R10.1 26.416,61.695 v2(26.416,59.741) ; v2(53.518,52.984) 53.895,52.607 U1.5
  Bottom Layer w0.254: v2(26.416,59.741) 28.537,57.62 49.771,57.62 53.518,53.873 v2(53.518,52.984)
TMS: J2.2 R12.1 U1.3 | length 40.2
  Top Layer w0.254: J2.2@24.83,67.107 24.83,66.853 27.828,63.856 27.828,61.976 28.069,61.735 R12.1 28.956,61.72 28.956,59.588 v2(28.981,59.563) ; v2(54.864,53.035) 54.895,53.004 U1.3
  Bottom Layer w0.254: v2(28.981,59.563) 29.007,59.563 30.328,58.242 50.089,58.242 50.114,58.268 54.864,53.518 v2(54.864,53.035)
U0-RX: J4.3 R138.2 | length 4.9
  Top Layer w0.635: R138.2 38.227,63.957 39.294,65.024 J4.3
U0-RXD: R40.1 U1.80 | length 20.7
  Top Layer w0.254: R40.1 40.134,52.807 v1(41.427,52.807) ; U1.80 58.045,51.136 v1(58.115,51.206)
  Bottom Layer w0.254: v1(41.427,52.807) 42.596,51.638 57.683,51.638 v1(58.115,51.206)
U0-TX: J4.2 R139.2 | length 5.2
  Top Layer w0.635: R139.2 43.104,64.732 J4.2
U0-TXD: R43.1 U1.79 | length 22.7
  Top Layer w0.254: R43.1 40.108,51.308 v1(41.326,51.308) ; U1.79 59.368,48.878 59.639,49.149 59.639,49.809 v1(59.207,50.241)
  Bottom Layer w0.254: v1(41.326,51.308) 41.504,51.308 41.707,51.105 56.191,51.105 57.013,50.282 59.166,50.282 v1(59.207,50.241)
VD12V: R15.1 R71.1 R72.1 | length 16.8
  Top Layer w0.635: R15.1 54.966,62.687 v3(54.991,62.662) ; v1(57.429,65.43) 57.437,65.423 R72.1 ; R71.1 63.68,65.483 v1(63.703,65.507)
  Bottom Layer w0.635: v3(54.991,62.662) 54.991,64.237 56.286,65.532 63.779,65.532 63.754,65.507 v1(63.703,65.507)
VDD12V: C18.2 C49.1 C50.1 C51.2 D6.2 D12.2 D13.2 D14.2 DC1.1 R60.2 R61.2 R63.2 RL1.2 RL2.2 RL3.2 U2.2 U2.7 | length 174.3
  Top Layer w0.381: C49.1 49.189,29.743 49.697,30.251 49.697,33.503 50.319,34.125 R61.2 ; C50.1 59.781,30.048 60.289,30.556 60.289,33.731 60.962,34.404 R63.2
  Top Layer w0.762: v1(37.49,29.337) 37.49,32.893 38.9,34.303 R60.2 ; C49.1 48.186,28.423 D12.2 47.449,25.931 RL1.2 ; RL1.2@48.204,24.556 RL1.2@48.249,24.511 ; C50.1 58.904,28.626 D13.2 58.041,25.857 58.173,25.857 RL2.2 ; C51.2 69.725,28.118 D14.2 69.217,25.463 RL3.2
  Top Layer w0.889: D6.2 23.484,61.43 DC1.1 ; U2.7 v5(24.964,49.206)
  Top Layer w0.914: v4(15.793,49.206) U2.2
  Top Layer w1.016: C18.2 23.764,52.959 23.979,53.175 ; DC1.1 23.484,53.67 23.979,53.175 ; v5(24.964,49.206) 25.084,49.327 25.084,52.07 23.979,53.175
  Bottom Layer w0.914: v5(24.964,49.206) v4(15.793,49.206) 7.702,49.206 5.918,47.422 5.918,31.217 6.883,30.251 36.601,30.251 v1@37.503,29.35 ; v1@37.567,29.286 37.567,24.13 37.541,24.105 37.541,23.266 38.684,22.123 48.489,22.123 ; RL1.2 48.489,24.841 48.489,22.123 ; RL2.2 59.164,22.181 59.106,22.123 ; RL3.2 67.071,22.123 59.106,22.123 ; 48.489,22.123 59.106,22.123
VS12V: D6.1 J1.1 R15.2 | length 42.8
  Top Layer w0.635: v1(50.013,61.392) 50.025,61.404 R15.2
  Top Layer w0.889: J1.1 16.866,64.62 D6.1
  Bottom Layer w0.635: J1.1 16.866,65.507 17.501,64.872 46.584,64.872 50.013,61.443 v1(50.013,61.392)
WDI: U1.25
XTAL1: C19.1 U1.19 Y1.2 | length 8.3
  Top Layer w0.254: U1.19 46.895,52.586 45.595,53.886 C19.1 45.595,56.731 46.649,57.785 Y1.2
XTAL2: C20.1 U1.20 Y1.1 | length 10
  Top Layer w0.254: Y1.1@41.239,57.785 42.941,57.785 43.893,56.832 C20.1 43.893,53.708 44.642,52.959 45.709,52.959 46.395,52.273 U1.20
Y1-IN: C61.2 J5.1 UG1.2 | length 11.9
  Top Layer w0.381: J5.1 63.627,67.488 62.255,66.116 62.255,63.602 63.144,62.713 C61.2 63.665,62.039 64.211,61.493 65.786,61.493 66.352,60.928 UG1.2
Y2-IN: C63.2 J5.3 UG2.2 | length 12.5
  Top Layer w0.381: J5.3 56.109,63.119 56.515,62.713 C63.2 57.442,61.862 57.836,61.468 60.706,61.468 60.992,61.182 UG2.2
YGND: J5.2 J5.4 R17.1 | length 12.7
  Top Layer w0.635: R17.1 51.702,66.891 J5.4 54.28,69.469 57.937,69.469 J5.2
pads on no net: 5.1 6.1 7.1 8.1 U1.1 U1.2 U1.4 U1.6 U1.7 U1.11 U1.13 U1.15 U1.17 U1.18 U1.22 U1.23 U1.26 U1.27 U1.28 U1.29 U1.30 U1.31 U1.32 U1.35 U1.36 U1.45 U1.46 U1.47 U1.48 U1.49 U1.52 U1.54 U1.55 U1.59 U1.60 U1.61 U1.63 U1.64 U1.65 U1.68 U1.69 U1.70 U1.71 U1.73 U1.74 U1.76 U2.8 U7.7 U7.8 U7.9 U7.10

## Polygon pours and split planes (outlines as drawn)
DGND on Top Layer "Top Layer-No Net" (solid, remove dead copper, pour order 2): 10.693,68.443 12.548,70.256 16.561,70.256 48.844,70.256 50.47,68.667 50.47,65.29 50.47,60.546 50.724,60.298 51.486,59.553 52.908,59.553 55.575,59.553 56.159,59.553 56.363,59.553 57.556,58.386 57.556,55.952 57.556,52.723 58.522,51.78 58.826,51.482 61.824,51.482 70.307,51.482 70.587,51.208 70.993,50.811 70.993,45.174 70.993,23.071 69.063,21.184 59.715,21.184 38.075,21.184 36.805,22.425 30.277,28.808 22.987,28.808 10.033,28.808 6.629,28.808 6.604,28.808 4.801,30.571 4.191,31.167 4.191,48.849 4.191,60.993 5.232,62.011 5.512,62.285 7.595,62.285 9.271,62.285 10.389,63.377 10.693,63.675 10.693,68.419
DGND on Bottom Layer "Top Layer-No Net" (solid, remove dead copper, pour order 4): 12.548,70.383 14.021,70.383 48.844,70.383 50.267,68.989 50.47,68.79 50.47,68.367 50.47,60.175 50.952,59.702 51.003,59.652 56.159,59.652 56.363,59.652 57.099,58.93 57.556,58.482 57.556,52.929 57.556,52.83 57.988,52.407 58.852,51.56 59.436,51.56 70.307,51.56 70.993,50.888 70.993,50.116 70.993,23.076 69.317,21.433 69.063,21.184 68.682,21.184 38.075,21.184 35.128,24.072 30.277,28.827 17.856,28.827 6.604,28.827 4.191,31.193 4.166,31.218 4.166,35.202 4.166,61.071 5.512,62.391 6.807,62.391 9.271,62.391 10.693,63.785 10.693,64.731 10.693,68.566 12.548,70.383

## Keep-outs
Keep-Out Layer:
  lines w0.254: -0.005,3.633 ccw(c3.67,3.721) 3.708,0.045 71.336,0.045 71.342,0.051 ; -0.002,3.636 -0.002,69.901 cw(c3.565,69.935) 3.556,73.503 3.558,73.5 70.815,73.5 ; 70.815,73.533 cw(c70.721,69.254) 75,69.16 75,3.632 cw(c71.383,3.667) 71.349,0.051

## Silkscreen, mask and mechanical layers (free items; w line width, h text height)
Top Overlay:
  lines w0.254: -10.083,67.476 -9.576,69 ; -10.034,5.486 -9.525,3.962 ; -9.83,69 -9.322,69 ; -9.779,3.962 -9.271,3.963 ; -9.557,44.505 -9.576,69 ; -9.544,28.457 -9.525,3.962 ; -9.067,67.476 -9.576,69 ; -9.018,5.487 -9.525,3.962 ; 5.001,-9.601 5.006,-9.093 ; 6.522,-9.871 5.004,-9.347 ; 6.533,-8.855 5.004,-9.347 ; 32.398,-9.636 5.004,-9.347 ; 42.605,-9.744 70,-10.033 ; 68.471,-10.525 70,-10.033 ; 68.481,-9.509 70,-10.033 ; 69.997,-10.287 70.003,-9.779
  lines w0.3: -19.519,4 5,4 5,-14.398 ; -17.006,69 5,69 ; 70,-15.111 70,4
  text "TCK" at 23.089,66.319 h2.03 r180
  text "TMS" at 27,66.319 h2.03 r180
  text "G" at 29.108,66.319 h2.03 r180
  text "3.3V" at 33.045,66.319 h2.03 r180
  text "DI2" at 55.524,66.319 h2.03 r180
  text "DI1" at 63.271,66.269 h2.03 r180
  text "G" at 14.859,66.142 h2.03 r180
  text "12V" at 18.974,66.142 h2.03 r180
  text "RX" at 40.589,66.015 h2.03 r180
  text "TX" at 44.526,66.015 h2.03 r180
  text "3.3V" at 48.844,66.015 h2.03 r180
  text "G" at 36.398,65.989 h2.03 r180
  text "MT-PowerDivider  V1.0.0" at 3.81,64.262 h2.03 r270
  text "Honeysuckle" at 1.905,60.63 h2.03 r270
  text "65.038 (mm)" at -10.471,44.25 h1.52 r270.04
  text "DO3" at 60.503,6.731 h2.03
  text "DO3" at 52.121,6.706 h2.03
  text "DO2" at 44.653,6.655 h2.03
  text "L1" at 14.01,6.604 h2.03
  text "DO1" at 37.668,6.604 h2.03
  text "H1" at 17.769,6.579 h2.03
  text "H2" at 24.881,6.579 h2.03
  text "L2" at 21.376,6.553 h2.03
  text "65 (mm)" at 32.643,-10.553 h1.52 r359.4

## Text inside footprints (layer, text, board x,y; h text height)
DC1: Top Overlay "+" at 24.807,56.277 h0.8 r180
DC2: Top Overlay "+" at 6.109,60.849 h0.8